# Altium PCB view_PCB_3_uC.PcbDoc
Units mm, origin at the board's own origin, x right, y up, seen from the top; angles counter-clockwise.
Board outline 123 x 119.5 mm, 2 copper layers (Top Layer, Bottom Layer); 6 components, 72 nets, 132 pads, 26 vias.
Unrouted connection lines stored in the file: 3.
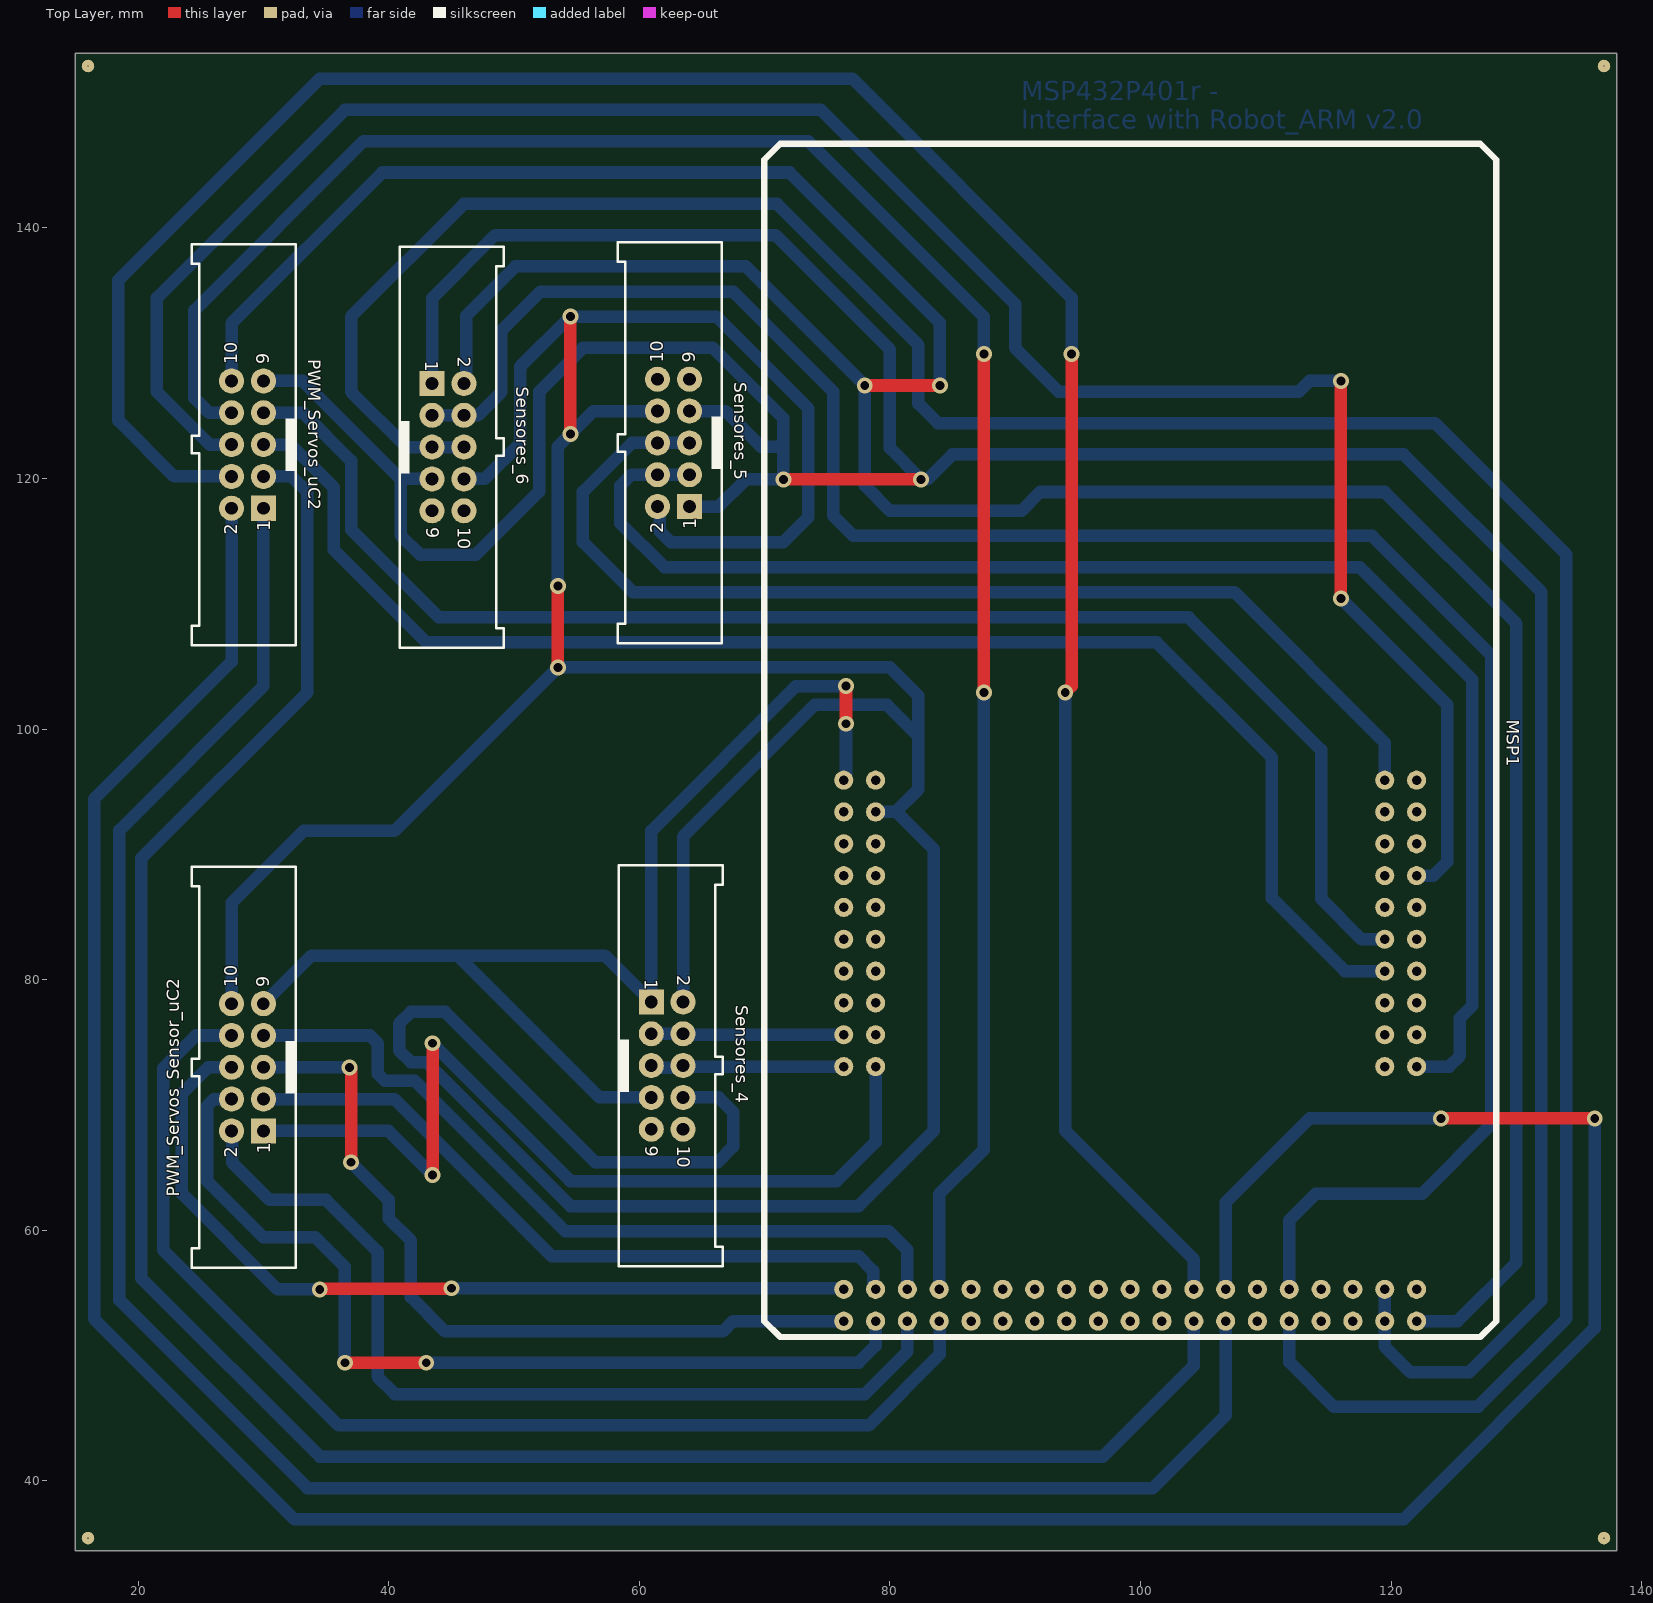
[diagram p0: Top Layer view]
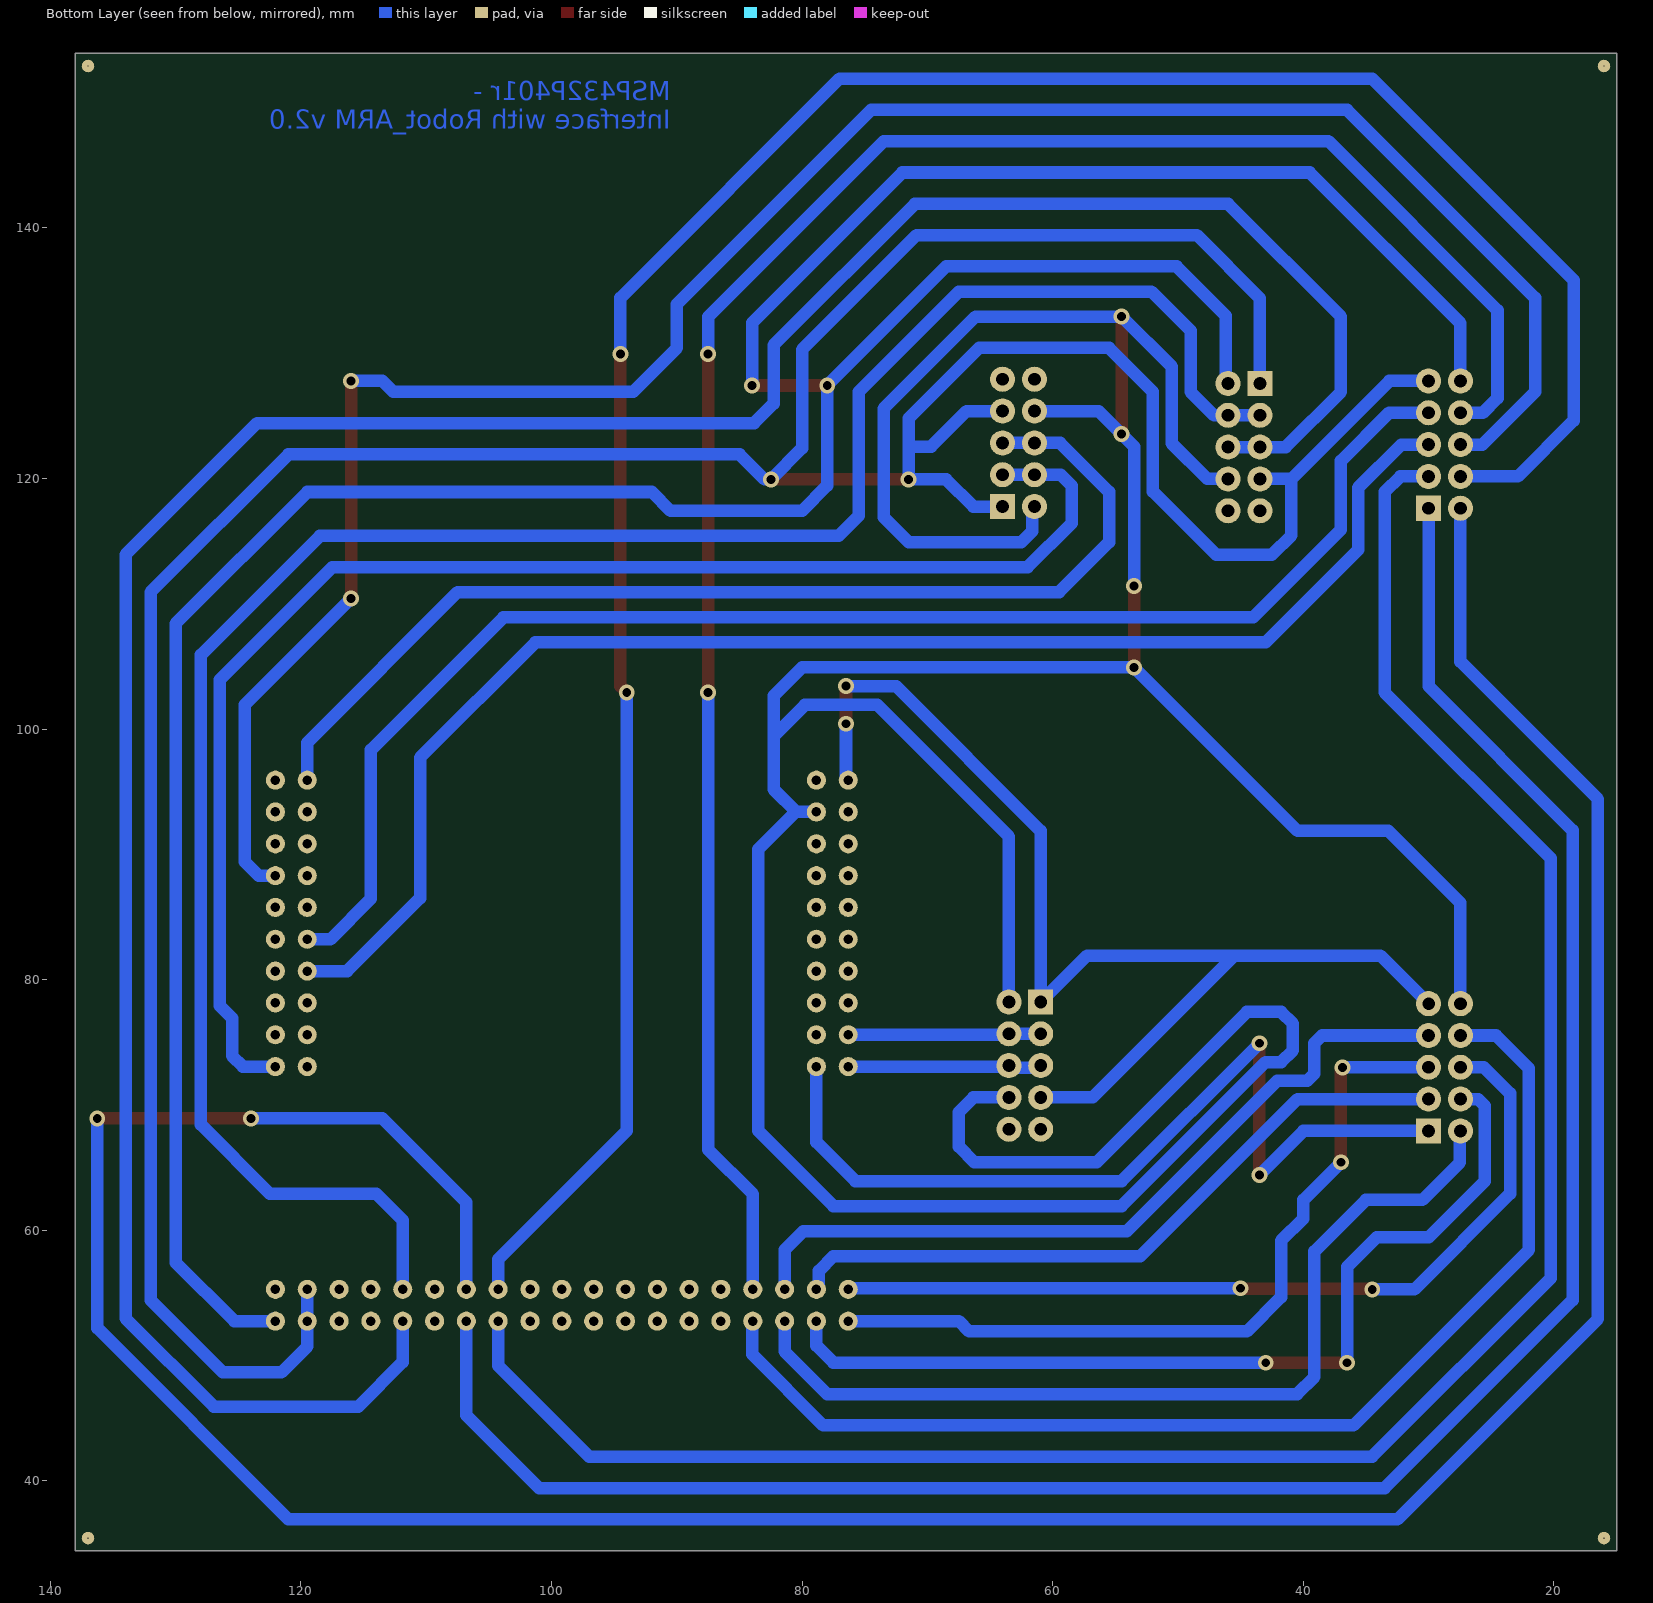
[diagram p1: Bottom Layer view, seen from below]

## Layer stack, top to bottom
Top Solder: solder mask 0.0102, Solder Resist, Dk 3.5
Top Layer: signal copper 0.0356
Dielectric 1: dielectric 0.32, FR-4, Dk 4.8
Bottom Layer: signal copper 0.0356
Bottom Solder: solder mask 0.0102, Solder Resist, Dk 3.5

## Board outline
15,34.42 138,34.42 138,153.92 15,153.92

## Design rules (kind name [scope] priority, off if disabled: settings)
Clearance [All] p1: gap=0.1 ignorepadtopadclearanceinfootprint=FALSE except(0: Arc-Hole Track-Hole SMDPad-Hole THPad-Hole Via-Hole Fill-Hole Poly-Hole Region-Hole Text-Hole; 0.254: Arc-Arc Arc-Track Arc-SMDPad Arc-THPad Arc-Via Track-Track Track-SMDPad Track-THPad Track-Via SMDPad-SMDPad SMDPad-THPad SMDPad-Via THPad-THPad THPad-Via Via-Via)
PolygonConnect [All] p1: connectstyle=Relief reliefconductorwidth=0.254 reliefentries=4 polygonreliefangle="90 Angle" airgapwidth=0.254
RoutingLayers [All] p1: top layer_v5=FALSE bottom layer_v5=TRUE
RoutingVias [All] p1: holewidth=0.711 width=1.27 viastyle="Through Hole" minholewidth=0.711 minwidth=1.27 maxholewidth=0.711 maxwidth=1.27
SolderMaskExpansion [All] p1: expansion=0.102
Width "Schematic Width Constraint_17" [InNet('GND_8V')] p1: maxlimit=1.27 minlimit=1.27 preferedwidth=1.27
Width "Schematic Width Constraint_16" [InNet('Servo_2')] p2: maxlimit=0.762 minlimit=0.762 preferedwidth=0.762
Width "Schematic Width Constraint_15" [InNet('Servo_3')] p3: maxlimit=0.762 minlimit=0.762 preferedwidth=0.762
Width "Schematic Width Constraint_14" [InNet('Servo_6')] p4: maxlimit=0.762 minlimit=0.762 preferedwidth=0.762
Width "Schematic Width Constraint_13" [InNet('Servo_4')] p5: maxlimit=0.762 minlimit=0.762 preferedwidth=0.762
Width "Schematic Width Constraint_12" [InNet('Servo_8')] p6: maxlimit=0.762 minlimit=0.762 preferedwidth=0.762
Width "Schematic Width Constraint_11" [InNet('Servo_5')] p7: maxlimit=0.762 minlimit=0.762 preferedwidth=0.762
Width "Schematic Width Constraint_10" [InNet('Servo_7')] p8: maxlimit=0.762 minlimit=0.762 preferedwidth=0.762
Width "Schematic Width Constraint_9" [InNet('VCC_8V')] p9: maxlimit=1.524 minlimit=1.27 preferedwidth=1.524
Width "Schematic Width Constraint_3" [InNet('Servo_1')] p10: maxlimit=0.762 minlimit=0.762 preferedwidth=0.762
Width [All] p11: maxlimit=2 minlimit=0.508 preferedwidth=1 minimp=50.000000 maximp=50.000000 favimp=50.000000
29 further rules are at their usual default settings.

## Classes and differential pairs
component class Placa_do_uControlador: PWM_Servos_Sensor_uC2 PWM_Servos_uC2 Sensores_4 Sensores_5 Sensores_6

## Components (designator, comment, footprint, x,y, rotation, side; value= is the part's Value field where it differs from the comment)
MSP1 "MSP432-support" MSP432_SUPORT 76.32,95.92 r0 top
PWM_Servos_Sensor_uC2 "61201022021" 61201022021#1 28.73,73 r90 top
PWM_Servos_uC2 "61201022021" 61201022021#2 28.73,122.704 r90 top
Sensores_4 "61201022021" 61201022021#3 62.23,73.136 r270 top
Sensores_5 "61201022021" 61201022021#3 62.73,122.84 r90 top
Sensores_6 "61201022021" 61201022021#3 44.73,122.5 r270 top

## Footprints (in the part's own frame and the unit in brackets; to place one, negate y for a bottom-side part, rotate by r counter-clockwise, add the part's x,y. Pads: shape width x height; smd on the part's side, far side on the other; paste and mask are expansions set on the pad)
61201022021#1 [mm] "10 pins, straight, short lever, gold plating"
  rect 2x2 hole 1.02: 1(-5.08,-1.27)
  round 2 hole 1.02: 2(-5.08,1.27) 3(-2.54,-1.27) 4(-2.54,1.27) 5(0,-1.27) 6(0,1.27) 7(2.54,-1.27) 8(2.54,1.27) 10(5.08,1.27)
  round 2 hole 1: 9(5.08,-1.27)
  silkscreen extent -16,-3.85 16,4.45, body extent -16.1,-3.85 16.1,4.45, height 24.55
61201022021#2 [mm] "10 pins, straight, short lever, gold plating"
  rect 2x2 hole 1.02: 1(-5.08,-1.27)
  round 2 hole 1.02: 2(-5.08,1.27) 3(-2.54,-1.27) 4(-2.54,1.27) 5(0,-1.27) 6(0,1.27) 7(2.54,-1.27) 8(2.54,1.27) 9(5.08,-1.27)
  round 2 hole 1.02 paste+0: 10(5.08,1.27)
  silkscreen extent -16,-3.85 16,4.45, body extent -16.1,-3.85 16.1,4.45, height 24.55
61201022021#3 [mm] "10 pins, straight, short lever, gold plating"
  rect 2x2 hole 1.02: 1(-5.08,-1.27)
  round 2 hole 1.02: 2(-5.08,1.27) 3(-2.54,-1.27) 4(-2.54,1.27) 5(0,-1.27) 6(0,1.27) 7(2.54,-1.27) 8(2.54,1.27) 9(5.08,-1.27) 10(5.08,1.27)
  silkscreen extent -16,-3.85 16,4.45, body extent -16.1,-3.85 16.1,4.45, height 24.55
MSP432_SUPORT [mil]
  round 60 hole 30: 1(0,0) 2(0,-100) 3(0,-200) 4(0,-300) 5(0,-400) 6(0,-500) 7(0,-600) 8(0,-700) 9(0,-800) 10(0,-900) 11(1800,-900) 12(1800,-800) 13(1800,-700) 14(1800,-600) 15(1800,-500) 16(1800,-400) 17(1800,-300) 18(1800,-200) 19(1800,-100) 20(1800,0) 21(100,0) 22(100,-100) 23(100,-200) 24(100,-300) 25(100,-400) 26(100,-500) 27(100,-600) 28(100,-700) 29(100,-800) 30(100,-900) 31(1700,-900) 32(1700,-800) 33(1700,-700) 34(1700,-600) 35(1700,-500) 36(1700,-400) 37(1700,-300) 38(1700,-200) 39(1700,-100) 40(1700,0) 41(0,-1700) 42(100,-1700) 43(200,-1700) 44(300,-1700) 45(400,-1700) 46(500,-1700) 47(600,-1700) 48(700,-1700) 49(800,-1700) 50(900,-1700) 51(1000,-1700) 52(1100,-1700) 53(1200,-1700) 54(1300,-1700) 55(1400,-1700) 56(1500,-1700) 57(1600,-1700) 58(1700,-1700) 59(1800,-1700) 60(0,-1600) 61(100,-1600) 62(200,-1600) 63(300,-1600) 64(400,-1600) 65(500,-1600) 66(600,-1600) 67(700,-1600) 68(800,-1600) 69(900,-1600) 70(1000,-1600) 71(1100,-1600) 72(1200,-1600) 73(1300,-1600) 74(1400,-1600) 75(1500,-1600) 76(1600,-1600) 77(1700,-1600) 78(1800,-1600)
  silkscreen extent -250,-1750 2050,2000, body extent -250,-1750 2050,2000, height 587

## Part data
MSP1: library part U*
PWM_Servos_Sensor_uC2 PWM_Servos_uC2 Sensores_4 Sensores_5 Sensores_6: "Male Box Header WR-BHD with lever, THT, Vertical, pitch 2.54 mm, 10 pins", Contact Resistance="20 mOhm", Operating Temperature="-40 to 125 degC", Withstanding Voltage="500 VAC", Working Voltage="250 VAC", ComponentLink1Description=Manufacturer, ComponentLink1URL=http://www.we-online.de, ComponentLink2Description=Datasheet, ComponentLink2URL=https://katalog.we-online.de/em/datasheet/6120xx22021.pdf, Gender=Male, Mounting Technology=THT, Orientation=Vertical, Packaging=Tray, Part Number=61201022021, Pin Number=10, Pitch="2.54 mm", Published Date="August 2018", Publisher="Wurth Elektronik"

## Free pads (board coordinates)
  round 1 hole 0.1: 1(16,35.42) 1(16,152.92) 1(137,35.42) 1(137,152.92)

## Via types
v1: diameter 1.27, hole 0.711, Top Layer to Bottom Layer, 26 vias

## Nets (pads, with @x,y where several pads share a name; then routed paths per layer and width w, separated by ;. In a path a pad name is that pad's centre, name@x,y a point inside that pad or via, vN(x,y) a via of type N, cw(c..) or ccw(c..) an arc to the next point about the centre after c; other vN are vias at no path point)
3V3_uC: MSP1.1 MSP1.58 MSP1.77 PWM_Servos_Sensor_uC2.9 PWM_Servos_uC2.9 Sensores_4.1 Sensores_4.7 Sensores_5.1 Sensores_5.7 Sensores_6.1 Sensores_6.7 | length 387.2
  Top Layer w1: v1(71.5,119.92) v1(82.5,119.92) ; v1(76.5,100.42) v1(76.5,103.42)
  Bottom Layer w1: PWM_Servos_Sensor_uC2.9 33.84,81.92 45.5,81.92 ; PWM_Servos_uC2.9 33.136,127.784 40.96,119.96 ; Sensores_6.7 40.96,119.96 ; Sensores_6.1 43.46,134.38 48.5,139.42 70.86,139.42 80,130.28 80,122.42 v1(82.5,119.92) 83,119.92 85,121.92 121,121.92 132,110.92 132,54.42 126.234,48.654 121.566,48.654 119.5,50.72 MSP1.58 MSP1.77 ; Sensores_4.7 56.824,70.596 45.5,81.92 ; Sensores_5.1 66.34,117.76 68.5,119.92 v1(71.5,119.92) 71.5,122.54 ; Sensores_5.7 66.876,125.38 69.716,122.54 71.5,122.54 ; MSP1.1 76.5,96.1 v1(76.5,100.42) ; v1(76.5,103.42) 72.5,103.42 60.96,91.88 Sensores_4.1 57.256,81.92 45.5,81.92 ; 40.96,119.96 40.96,115.46 42.5,113.92 46.96,113.92 52,118.96 52,126.92 55.5,130.42 65.866,130.42 71.5,124.786 71.5,122.54
"ADD 2": MSP1.20 MSP1.22 MSP1.59 PWM_Servos_Sensor_uC2.10 PWM_Servos_uC2.10 Sensores_4.2 Sensores_4.8 Sensores_5.2 Sensores_5.8 Sensores_6.2 Sensores_6.8 | length 590.9
  Top Layer w1: v1(53.5,104.92) v1(53.5,111.42) ; v1(54.5,123.54) v1(54.5,132.92) ; v1(78,127.42) v1(84,127.42)
  Bottom Layer w1: PWM_Servos_Sensor_uC2.10 27.46,86.126 33.214,91.88 40.46,91.88 v1(53.5,104.92) 80,104.92 82.273,102.647 82.273,99.42 ; PWM_Servos_uC2.10 27.46,132.388 39.492,144.42 72,144.42 84,132.42 v1(84,127.42) ; Sensores_6.8 47.66,119.96 50.5,122.8 50.5,128.92 v1(54.5,132.92) 66.16,132.92 73.5,125.58 73.5,116.92 71.5,114.92 62.5,114.92 61.651,115.769 61.651,117.569 Sensores_5.2 ; Sensores_6.2 46.191,127.771 46.191,132.991 50.12,136.92 68.5,136.92 v1(78,127.42) 78,119.42 80,117.42 90.5,117.42 92,118.92 119.5,118.92 130,108.42 130,57.42 125.32,52.74 MSP1.59 MSP1.59@122.231,52.931 ; v1(53.5,111.42) 53.5,122.54 v1(54.5,123.54) 56.34,125.38 Sensores_5.8 ; Sensores_4.8 66.324,70.596 67.5,69.42 67.5,66.674 66.246,65.42 56.5,65.42 44.5,77.42 41.762,77.42 40.828,76.486 40.828,74.354 41.762,73.42 43,73.42 54.5,61.92 77.5,61.92 83.5,67.92 83.5,90.42 80.54,93.38 80.46,93.38 ; Sensores_4.2 63.5,91.42 74,101.92 79.773,101.92 82.273,99.42 ; MSP1.22 80.46,93.38 ; 80.46,93.38 82.273,95.193 82.273,99.42
DBG0: MSP1.31
DBG1: MSP1.32
DBG2: MSP1.33
"GND (SENSOR)": 
GND_8V: 
I2C1-SCL: MSP1.9 Sensores_4.3 Sensores_4.4 | length 15.5
  Bottom Layer w1: Sensores_4.3 Sensores_4.4 ; Sensores_4.4@63.344,75.6 MSP1.9
I2C1-SDA: MSP1.10 Sensores_4.5 Sensores_4.6 | length 15.5
  Bottom Layer w1: Sensores_4.5@60.804,72.98 Sensores_4.6@63.344,72.98 ; Sensores_4.6@63.344,73.06 MSP1.10
I2C2-SCL: MSP1.40 Sensores_5.5 Sensores_5.6 | length 87.8
  Bottom Layer w1: Sensores_5.5 Sensores_5.6 59.42,122.84 55.5,118.92 55.5,114.92 59.5,110.92 107.5,110.92 119.5,98.92 MSP1.40
I2C2-SDA: MSP1.11 Sensores_5.3 Sensores_5.4 | length 116.3
  Bottom Layer w1: Sensores_5.3 Sensores_5.4 59.38,120.3 58.5,119.42 58.5,116.42 62,112.92 117.5,112.92 126.5,103.92 126.5,77.92 125.5,76.92 125.5,73.92 124.64,73.06 MSP1.11
I2C3-SCL: MSP1.55 Sensores_6.5 Sensores_6.6 | length 222.6
  Bottom Layer w1: Sensores_6.6 Sensores_6.5 41.42,122.5 37,126.92 37,132.92 46,141.92 71,141.92 82.273,130.647 82.273,125.971 83.824,124.42 123.5,124.42 134,113.92 134,52.96 126.96,45.92 115.42,45.92 111.88,49.46 MSP1.55
I2C3-SDA: MSP1.74 Sensores_6.3 Sensores_6.4 | length 171.6
  Bottom Layer w1: Sensores_6.3 Sensores_6.4 47.12,125.04 49,126.92 49,131.8 52.12,134.92 67.5,134.92 75.5,126.92 75.5,117.006 77.086,115.42 118.5,115.42 128,105.92 128,68.42 122.5,62.92 114,62.92 111.88,60.8 MSP1.74
NetQ1_1: 
NetQ1_2: 
NetQ2_1: 
NetQ2_2: 
NetQ3_1: 
NetQ3_2: 
NetQ4_1: 
NetQ4_2: 
NetQ5_1: 
NetQ5_2: 
NetQ6_1: 
NetQ6_2: 
NetQ7_1: 
NetQ7_2: 
NetQ8_1: 
NetQ8_2: 
NetR1_1: 
NetR2_1: 
NetR3_1: 
NetR4_1: 
NetR9_1: 
NetR10_1: 
NetR11_1: 
NetR12_1: 
NetR17_1: 
NetR18_1: 
NetR19_1: 
NetR20_1: 
NetR25_1: 
NetR26_1: 
NetR27_1: 
NetR28_1: 
PWM_Servo_1: MSP1.53 PWM_Servos_uC2.1 | length 172.4
  Bottom Layer w1: PWM_Servos_uC2.1 30,103.42 18.5,91.92 18.5,54.42 33.5,39.42 101,39.42 106.8,45.22 MSP1.53
PWM_Servo_2: MSP1.72 PWM_Servos_uC2.2 | length 257.9
  Top Layer w1: v1(124,68.92) v1(136.259,68.92)
  Bottom Layer w1: PWM_Servos_uC2.2 27.46,105.38 16.491,94.411 16.491,52.929 32.5,36.92 121,36.92 136.259,52.179 v1(136.259,68.92) ; MSP1.72 106.8,62.22 113.5,68.92 v1(124,68.92)
PWM_Servo_3: MSP1.52 PWM_Servos_uC2.3 | length 168.7
  Bottom Layer w1: PWM_Servos_uC2.3 32.256,120.164 33.5,118.92 33.5,102.92 20.246,89.666 20.246,56.174 34.5,41.92 97,41.92 104.26,49.18 MSP1.52
PWM_Servo_4: MSP1.71 PWM_Servos_uC2.4 | length 195.7
  Top Layer w1: v1(94,102.92) 94.5,103.42 v1(94.5,129.92)
  Bottom Layer w1: PWM_Servos_uC2.4 22.876,120.164 18.414,124.626 18.414,135.834 34.5,151.92 77,151.92 94.5,134.42 v1(94.5,129.92) ; v1(94,102.92) 94,67.92 104.26,57.66 MSP1.71
PWM_Servo_5: MSP1.34 PWM_Servos_uC2.5 | length 116.4
  Bottom Layer w1: PWM_Servos_uC2.5 32.176,122.704 35.622,119.258 35.622,114.298 43,106.92 101.3,106.92 110.5,97.72 110.5,86.506 116.326,80.68 MSP1.34
PWM_Servo_6: MSP1.17 PWM_Servos_uC2.6 | length 172.6
  Top Layer w1: v1(116,110.42) v1(116,127.784)
  Bottom Layer w1: PWM_Servos_uC2.6 25.716,122.704 21.5,126.92 21.5,134.42 36.5,149.42 74.5,149.42 90,133.92 90,130.42 93.5,126.92 112.636,126.92 113.5,127.784 v1(116,127.784) ; v1(116,110.42) 124.5,101.92 124.5,89.42 123.38,88.3 MSP1.17 ; MSP1.17 122.04,88.328 122.012,88.3 MSP1.17
PWM_Servo_7: MSP1.35 PWM_Servos_uC2.7 | length 117.1
  Bottom Layer w1: PWM_Servos_uC2.7 33.155,125.244 37,121.399 37,115.92 44,108.92 103.84,108.92 114.42,98.34 114.42,86.46 117.66,83.22 MSP1.35
PWM_Servo_8: MSP1.63 PWM_Servos_uC2.8 | length 163.9
  Top Layer w1: v1(87.5,102.92) v1(87.5,129.92)
  Bottom Layer w1: PWM_Servos_uC2.8 25.676,125.244 24.5,126.42 24.5,133.42 38,146.92 73.48,146.92 87.5,132.9 v1(87.5,129.92) ; MSP1.63 83.94,62.88 87.5,66.44 v1(87.5,102.92)
Sensor_Servo_1: MSP1.30 PWM_Servos_Sensor_uC2.1 | length 72.7
  Top Layer w1: v1(43.5,64.42) v1(43.5,74.92)
  Bottom Layer w1: PWM_Servos_Sensor_uC2.1 40,67.92 v1(43.5,64.42) ; v1(43.5,74.92) 54.5,63.92 75.746,63.92 78.86,67.034 MSP1.30
Sensor_Servo_2: MSP1.43 PWM_Servos_Sensor_uC2.2 | length 73.8
  Bottom Layer w1: PWM_Servos_Sensor_uC2.2 27.5,67.88 27.5,65.42 30.5,62.42 35,62.42 39.119,58.301 39.119,48.301 40.5,46.92 78,46.92 81.4,50.32 MSP1.43
Sensor_Servo_3: MSP1.61 PWM_Servos_Sensor_uC2.3 | length 55.9
  Bottom Layer w1: PWM_Servos_Sensor_uC2.3 40.46,70.46 53,57.92 77.5,57.92 78.669,56.751 78.669,55.471 MSP1.61
Sensor_Servo_4: MSP1.42 PWM_Servos_Sensor_uC2.4 | length 74.6
  Top Layer w1: v1(36.5,49.42) v1(43,49.42)
  Bottom Layer w1: PWM_Servos_Sensor_uC2.4 26.04,70.46 25.5,69.92 25.5,63.92 30,59.42 34.143,59.42 36.5,57.063 v1(36.5,49.42) ; v1(43,49.42) 77.5,49.42 78.86,50.78 MSP1.42
Sensor_Servo_5: MSP1.41 PWM_Servos_Sensor_uC2.5 | length 63.3
  Top Layer w1: v1(36.88,73) 37,72.88 v1(37,65.42)
  Bottom Layer w1: PWM_Servos_Sensor_uC2.5 v1(36.88,73) ; v1(37,65.42) 40,62.42 40,60.92 41.762,59.158 41.762,54.658 44.5,51.92 66.68,51.92 67.5,52.74 MSP1.41
Sensor_Servo_6: MSP1.60 PWM_Servos_Sensor_uC2.6 | length 68.9
  Top Layer w1: v1(34.5,55.28) 34.544,55.324 44.956,55.324 v1(45,55.368)
  Bottom Layer w1: PWM_Servos_Sensor_uC2.6 25.58,73 23.5,70.92 23.5,62.92 31.14,55.28 v1(34.5,55.28) ; v1(45,55.368) 76.232,55.368 MSP1.60
Sensor_Servo_7: MSP1.62 PWM_Servos_Sensor_uC2.7 | length 63
  Bottom Layer w1: PWM_Servos_Sensor_uC2.7 38.5,75.54 39.119,74.921 39.119,72.506 39.705,71.92 42.08,71.92 54.08,59.92 79.9,59.92 81.4,58.42 MSP1.62
Sensor_Servo_8: MSP1.44 PWM_Servos_Sensor_uC2.8 | length 93.8
  Bottom Layer w1: PWM_Servos_Sensor_uC2.8 24.62,75.54 22,72.92 22,58.42 36,44.42 78.32,44.42 84,50.1 MSP1.44@84,52.74
Servo_1: 
Servo_2: 
Servo_3: 
Servo_4: 
Servo_5: 
Servo_6: 
Servo_7: 
Servo_8: 
"VCC  (SENSOR)": 
VCC_8V: 
VCC_uC: 
pads on no net: MSP1.2 MSP1.3 MSP1.4 MSP1.5 MSP1.6 MSP1.7 MSP1.8 MSP1.12 MSP1.13 MSP1.14 MSP1.15 MSP1.16 MSP1.18 MSP1.19 MSP1.21 MSP1.23 MSP1.24 MSP1.25 MSP1.26 MSP1.27 MSP1.28 MSP1.29 MSP1.36 MSP1.37 MSP1.38 MSP1.39 MSP1.45 MSP1.46 MSP1.47 MSP1.48 MSP1.49 MSP1.50 MSP1.51 MSP1.54 MSP1.56 MSP1.57 MSP1.64 MSP1.65 MSP1.66 MSP1.67 MSP1.68 MSP1.69 MSP1.70 MSP1.73 MSP1.75 MSP1.76 MSP1.78 Sensores_4.9 Sensores_4.10 Sensores_5.9 Sensores_5.10 Sensores_6.9 Sensores_6.10

## Other copper
Bottom Layer:
  text "MSP432P401r -  / Interface with Robot_ARM v2.0" at 90.5,147.92 h1.52

## Dimensions
15,153.92 to 138,154 on Top Overlay
15,154 to 15,34.42 on Top Overlay

## Text inside footprints (layer, text, board x,y; h text height)
PWM_Servos_Sensor_uC2: Top Overlay "2" at 27.93,65.8 h1.02 r90; Top Overlay "10" at 27.93,79.4 h1.02 r90; Top Overlay "1" at 30.53,66.1 h1.02 r90; Top Overlay "9" at 30.47,79.4 h1.02 r90
PWM_Servos_uC2: Top Overlay "9" at 30.47,129.104 h1.02 r90; Top Overlay "1" at 30.53,115.804 h1.02 r90; Top Overlay "10" at 27.93,129.104 h1.02 r90; Top Overlay "2" at 27.93,115.504 h1.02 r90
Sensores_4: Top Overlay "9" at 60.49,66.736 h1.02 r270; Top Overlay "1" at 60.43,80.036 h1.02 r270; Top Overlay "10" at 63.03,66.736 h1.02 r270; Top Overlay "2" at 63.03,80.336 h1.02 r270
Sensores_5: Top Overlay "9" at 64.47,129.24 h1.02 r90; Top Overlay "1" at 64.53,115.94 h1.02 r90; Top Overlay "10" at 61.93,129.24 h1.02 r90; Top Overlay "2" at 61.93,115.64 h1.02 r90
Sensores_6: Top Overlay "9" at 42.99,116.1 h1.02 r270; Top Overlay "1" at 42.93,129.4 h1.02 r270; Top Overlay "10" at 45.53,116.1 h1.02 r270; Top Overlay "2" at 45.53,129.7 h1.02 r270